# Altium PCB plaqueta.PcbDoc
Units mm, origin at the board's own origin, x right, y up, seen from the top; angles counter-clockwise.
Board outline 100 x 100.08 mm, 2 copper layers (Top Layer, Bottom Layer); 42 components, 19 nets, 121 pads, 0 vias.
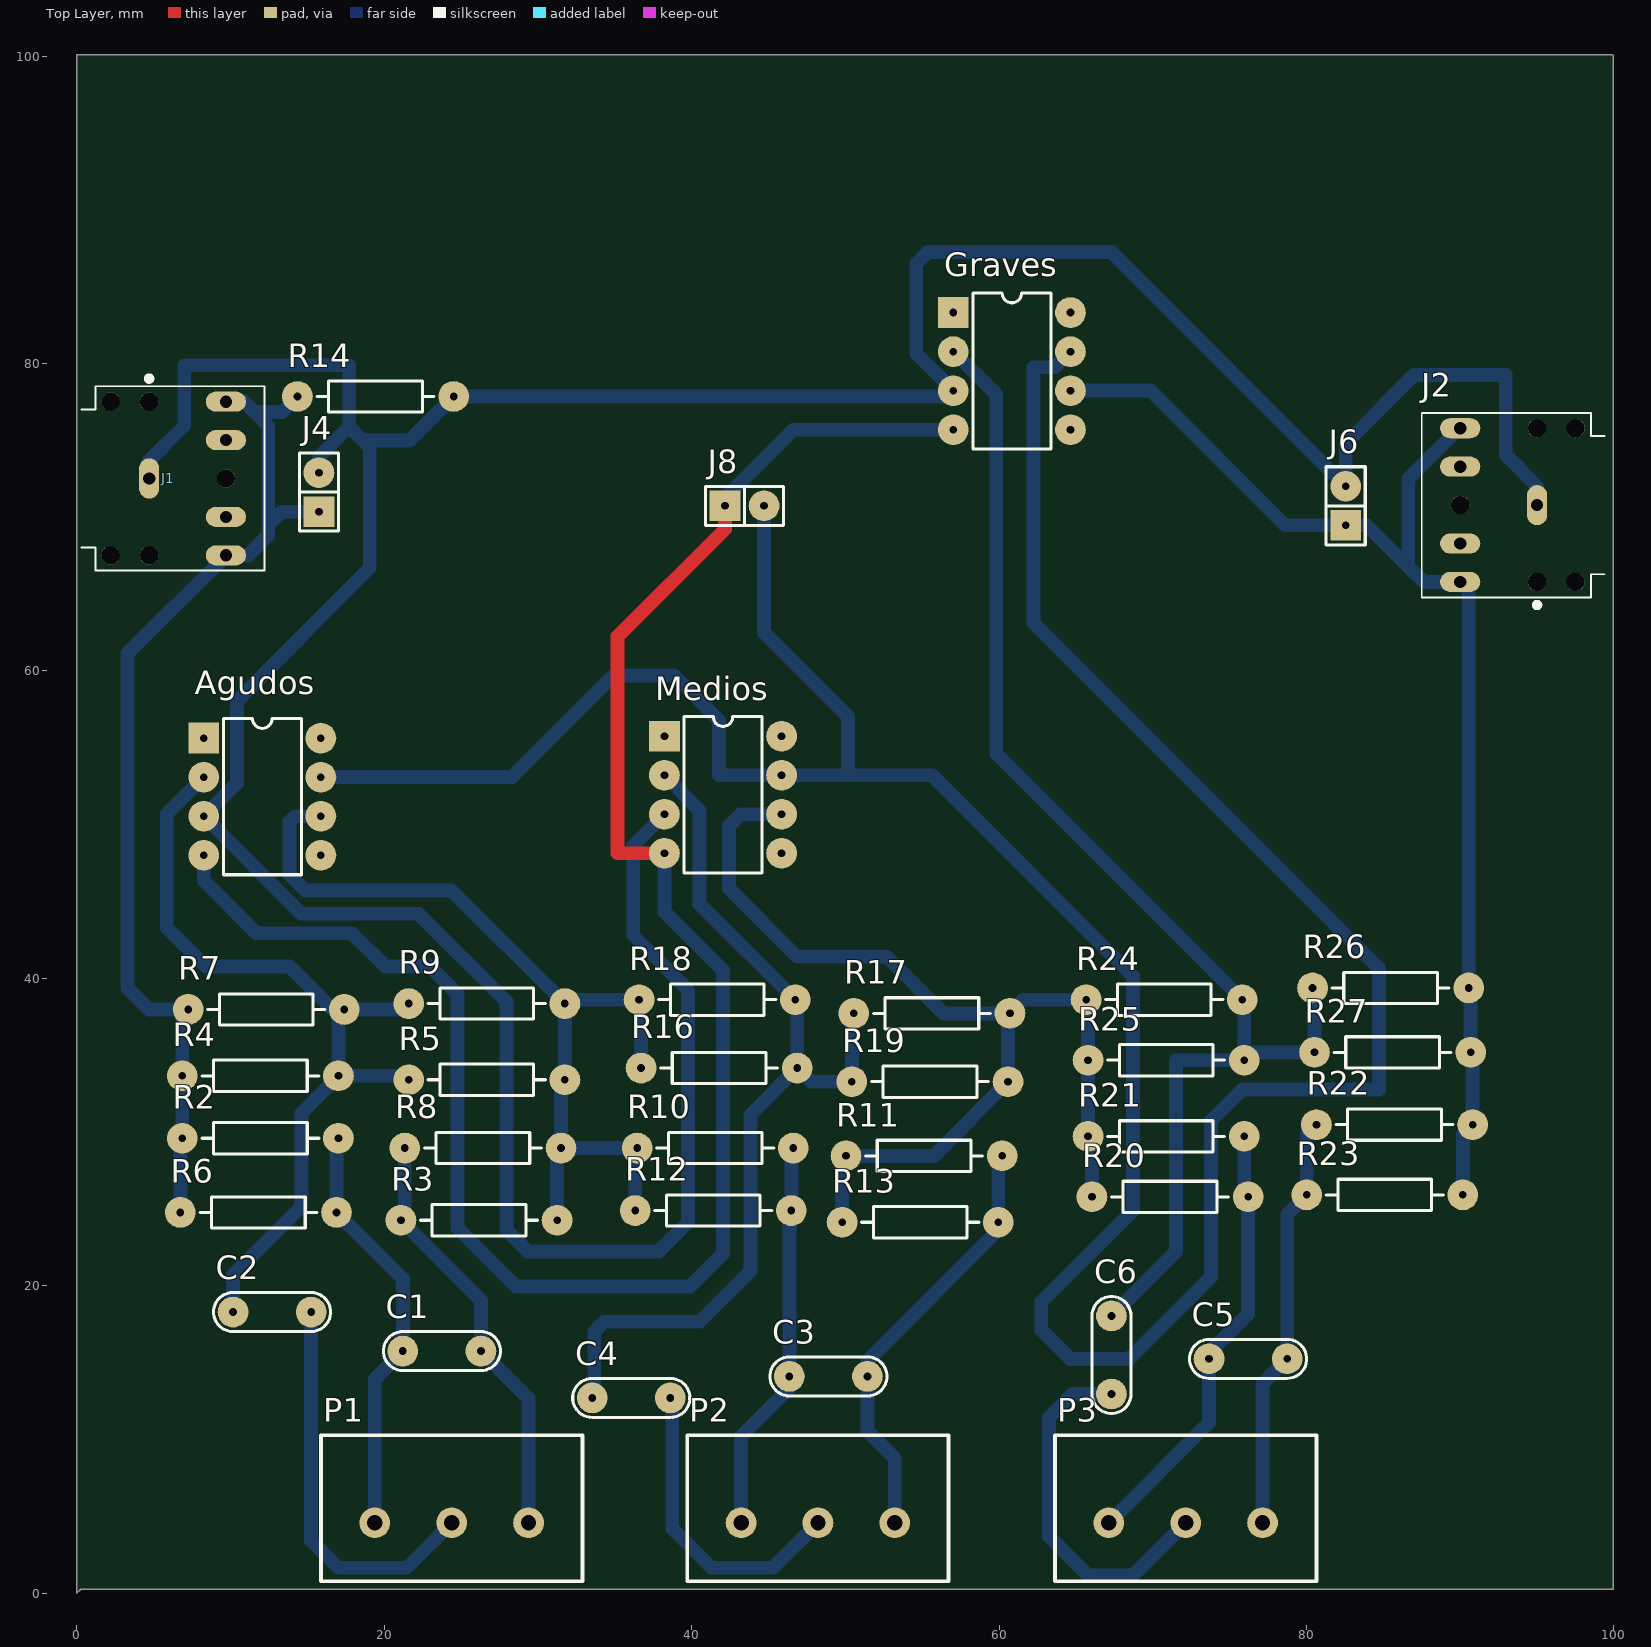
[diagram p0: Top Layer view]
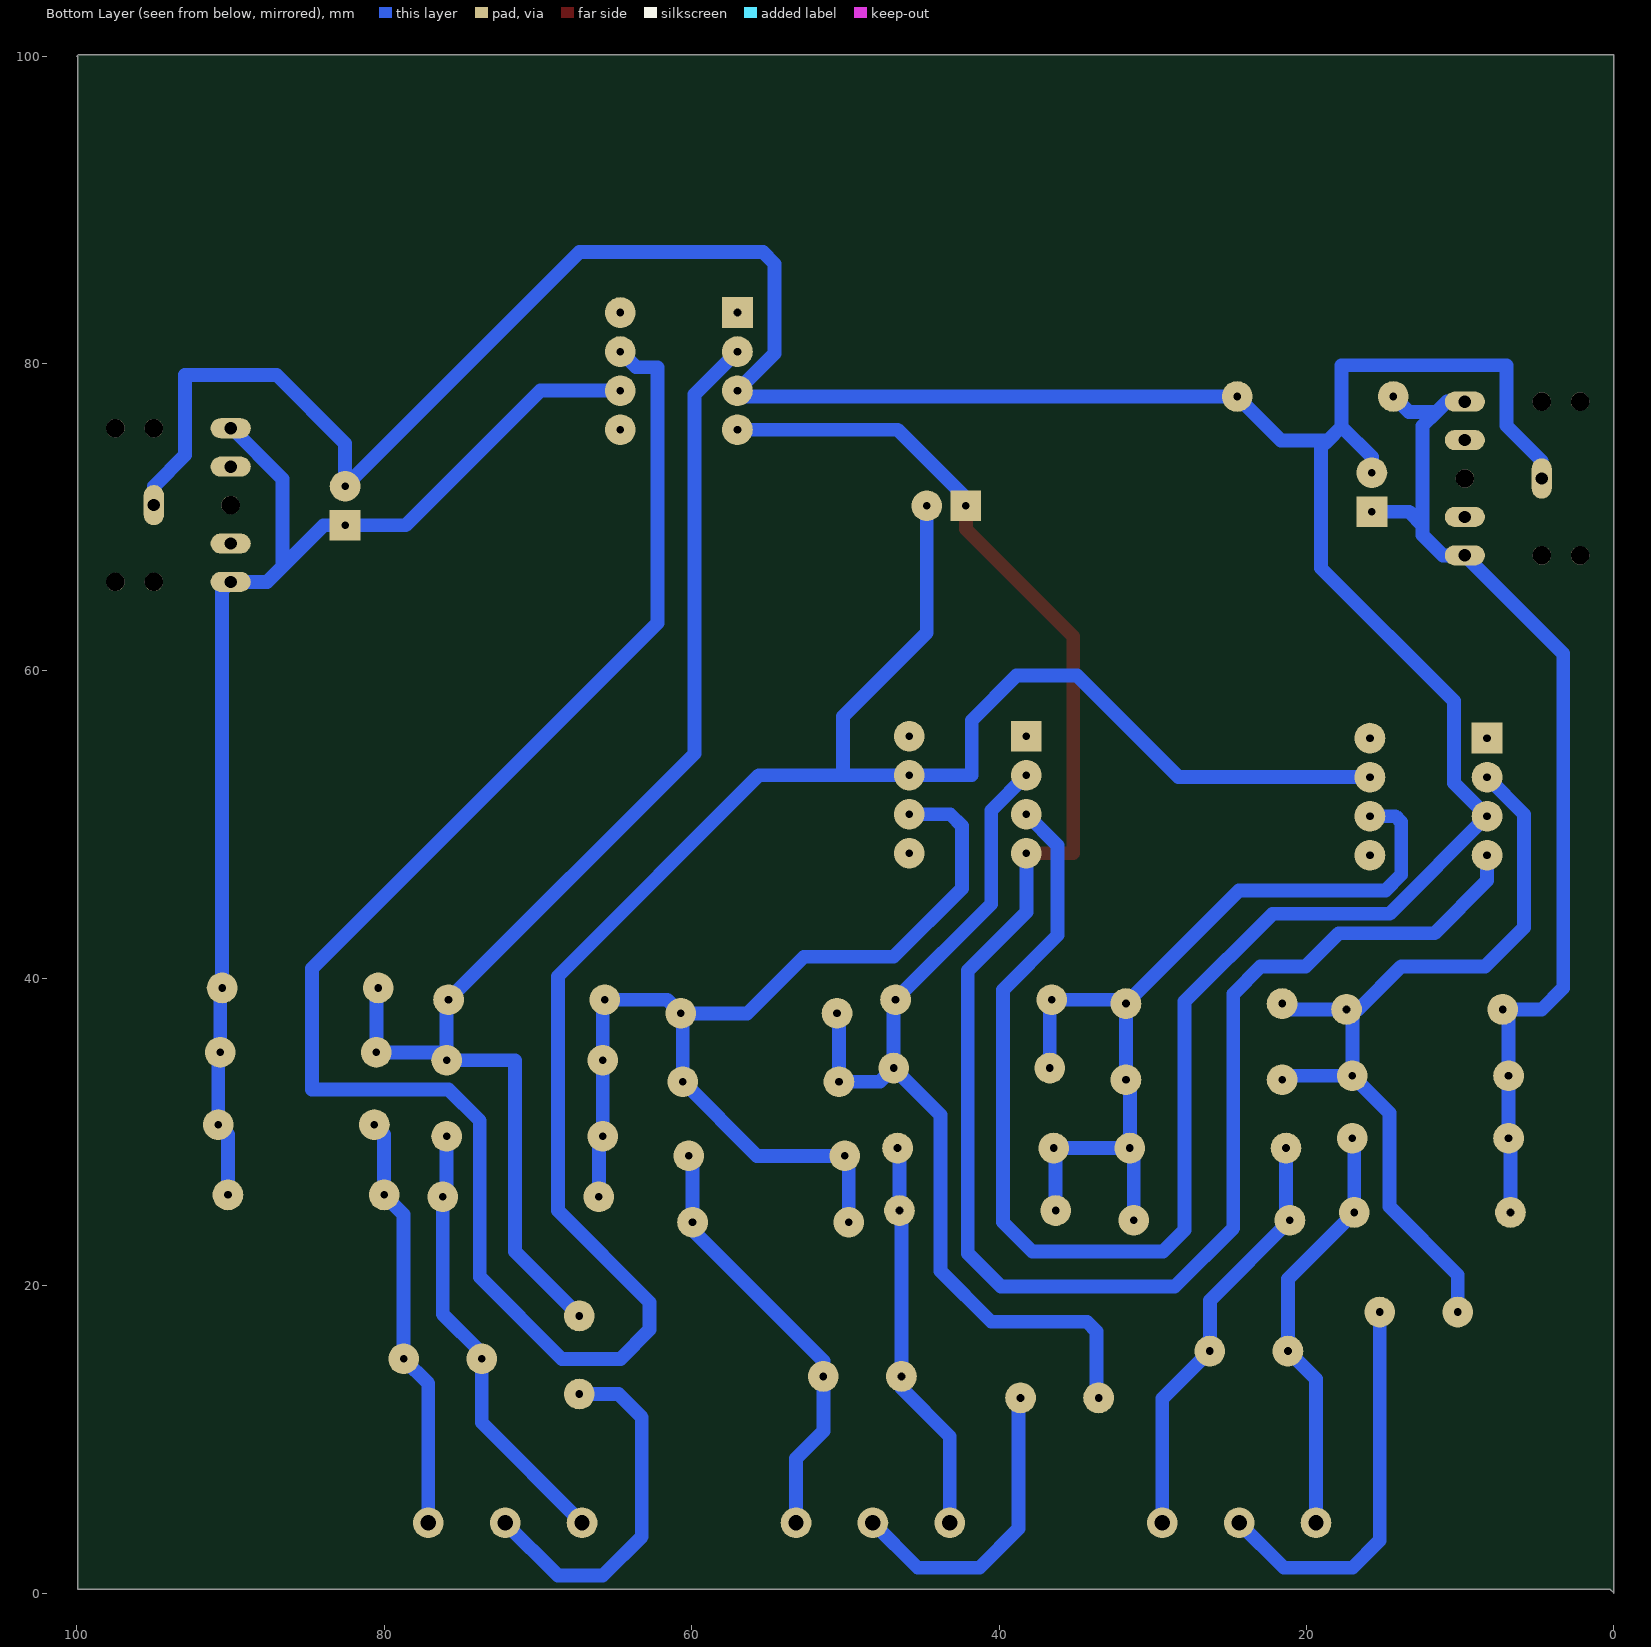
[diagram p1: Bottom Layer view, seen from below]
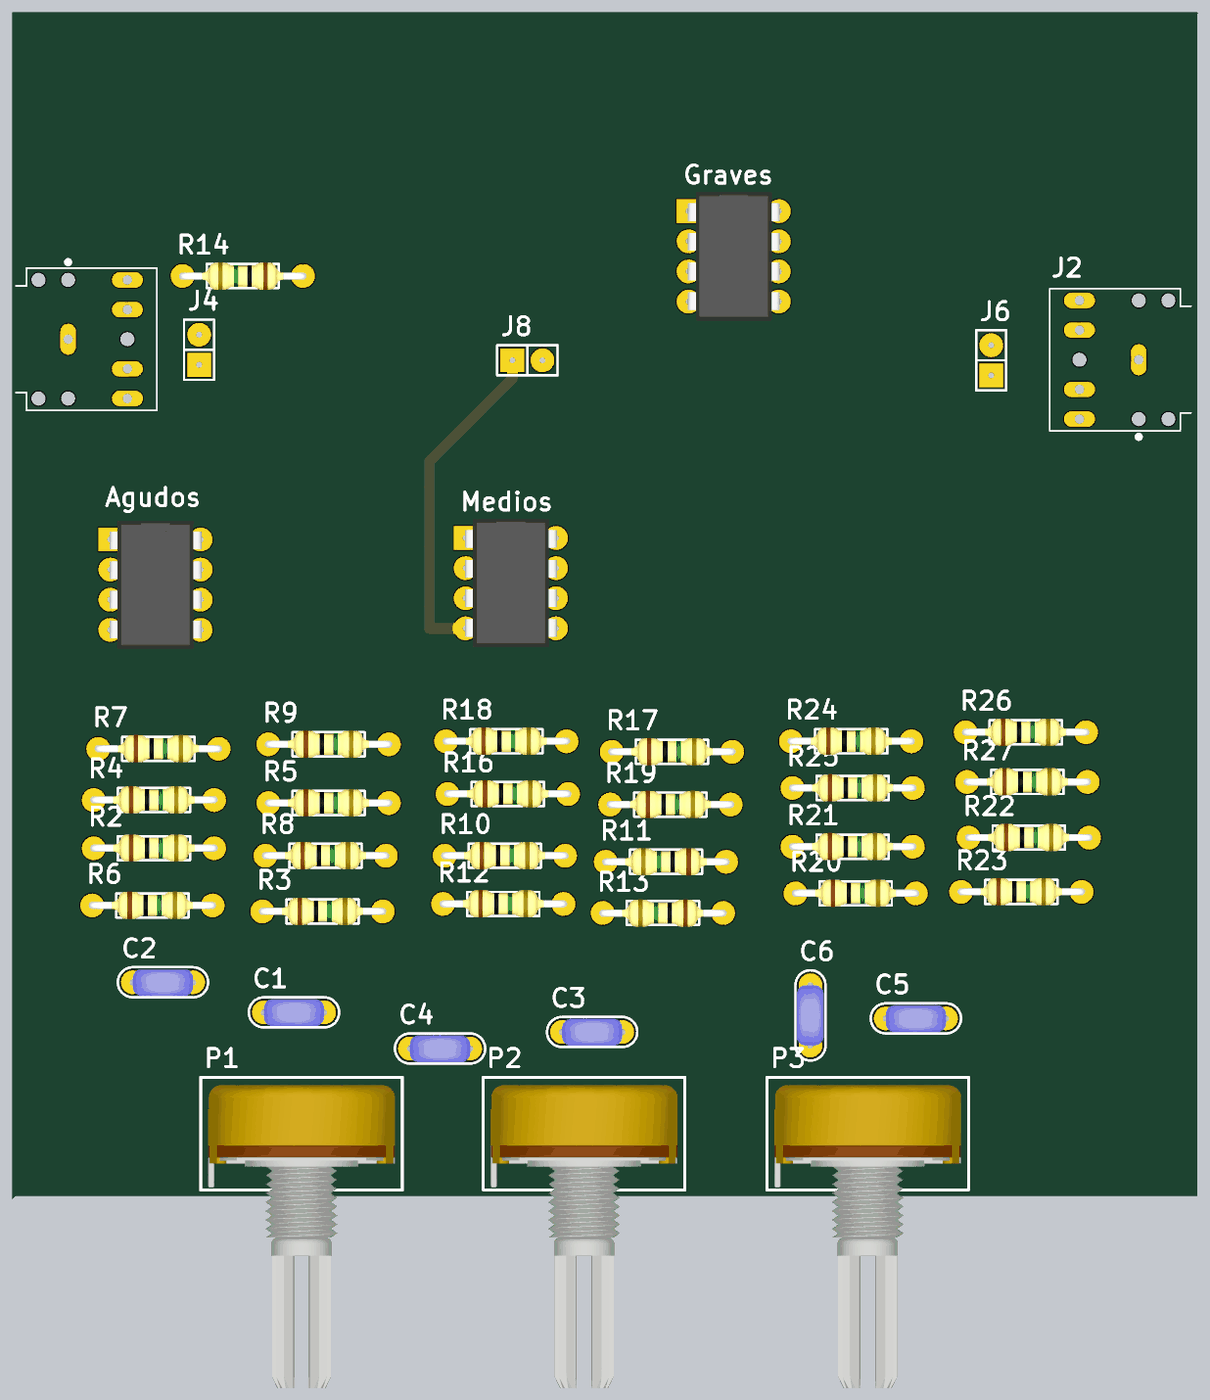
[diagram p2: 3D render of the assembled board from above, using the file's embedded part models]

## Layer stack, top to bottom
Top Solder: solder mask 0.0102, Solder Resist, Dk 3.5
Top Layer: signal copper 0.0356
Dielectric 1: dielectric 0.32, FR-4, Dk 4.8
Bottom Layer: signal copper 0.0356
Bottom Solder: solder mask 0.0102, Solder Resist, Dk 3.5

## Board outline
0,0 0.254,0.254 99.949,0.254 99.949,99.949 100,100 99.924,100.076 0,100.076

## Design rules (kind name [scope] priority, off if disabled: settings)
Clearance [All] p1: gap=0.254 ignorepadtopadclearanceinfootprint=FALSE except(0: Arc-Hole Track-Hole SMDPad-Hole THPad-Hole Via-Hole Fill-Hole Poly-Hole Region-Hole Text-Hole)
PolygonConnect [All] p1: connectstyle=Relief reliefconductorwidth=0.254 reliefentries=4 polygonreliefangle="90 Angle" airgapwidth=0.254
RoutingVias [All] p1: holewidth=0.711 width=1.27 viastyle="Through Hole" minholewidth=0.711 minwidth=1.27 maxholewidth=0.711 maxwidth=1.27
SolderMaskExpansion [All] p1: expansion=0.102
Width [All] p1: maxlimit=0.9 minlimit=0.9 preferedwidth=0.9
30 further rules are at their usual default settings.

## Components (designator, comment, footprint, x,y, rotation, side; value= is the part's Value field where it differs from the comment)
Agudos "IC_DIP8" DIP8 8.255,55.626 r0 top
C1 "CAP" CAP200 23.749,15.748 r0 top
C2 "CAP" CAP200 12.7,18.288 r0 top
C3 "CAP" CAP200 48.895,14.097 r0 top
C4 "CAP" CAP200 36.068,12.7 r0 top
C5 "CAP" CAP200 76.2,15.24 r0 top
C6 "CAP" CAP200 67.31,15.494 r270 top
Graves "IC_DIP8" DIP8 57.023,83.312 r0 top
J1 "SJ1-3525NG-GR" CUI_SJ1-3525NG-GR 4.699,72.517 r0 top
J2 "SJ1-3525NG-GR" CUI_SJ1-3525NG-GR 94.996,70.786 r180 top
J4 "CON2" SIP2 15.748,71.628 r90 top
J6 "CON2" SIP2 82.55,70.739 r90 top
J8 "CON2" SIP2 43.434,70.739 r0 top
Medios "IC_DIP8" DIP8 38.227,55.753 r0 top
P1 "POTENCIOMETRO" POTENCIOMETRO 24.384,4.572 r0 top
P2 "POTENCIOMETRO" POTENCIOMETRO 48.213,4.572 r0 top
P3 "POTENCIOMETRO" POTENCIOMETRO 72.136,4.572 r0 top
R2 "RES" RES400 6.858,29.591 r0 top
R3 "RES" RES400 21.082,24.257 r0 top
R4 "RES" RES400 6.858,33.655 r0 top
R5 "RES" RES400 21.59,33.401 r0 top
R6 "RES" RES400 6.731,24.765 r0 top
R7 "RES" RES400 7.239,37.973 r0 top
R8 "RES" RES400 21.336,28.956 r0 top
R9 "RES" RES400 21.59,38.354 r0 top
R10 "RES" RES400 36.449,28.956 r0 top
R11 "RES" RES400 60.198,28.448 r180 top
R12 "RES" RES400 36.322,24.892 r0 top
R13 "RES" RES400 59.944,24.13 r180 top
R14 "RES" RES400 24.511,77.851 r180 top
R16 "RES" RES400 36.703,34.163 r0 top
R17 "RES" RES400 50.546,37.719 r0 top
R18 "RES" RES400 36.576,38.608 r0 top
R19 "RES" RES400 50.419,33.274 r0 top
R20 "RES" RES400 66.04,25.781 r0 top
R21 "RES" RES400 65.786,29.718 r0 top
R22 "RES" RES400 80.645,30.48 r0 top
R23 "RES" RES400 80.01,25.908 r0 top
R24 "RES" RES400 65.659,38.608 r0 top
R25 "RES" RES400 65.786,34.671 r0 top
R26 "RES" RES400 80.391,39.37 r0 top
R27 "RES" RES400 80.518,35.179 r0 top

## Footprints (in the part's own frame and the unit in brackets; to place one, negate y for a bottom-side part, rotate by r counter-clockwise, add the part's x,y. Pads: shape width x height; smd on the part's side, far side on the other; paste and mask are expansions set on the pad)
CAP200 [mm]
  round 2 hole 0.5: 1(-2.54,0) 2(2.54,0)
  silkscreen extent -3.81,-1.27 3.81,1.27, body extent -2.79,-1.17 2.79,1.12, height 6.24
CUI_SJ1-3525NG-GR [mm]
  oval 1.308x2.616 hole 0.8: 1(0,0)
  oval 2.616x1.308 hole 0.8: 2(5,-5) 3(5,5) 4(5,-2.5) 5(5,2.5)
  round 1.2 hole 1.2 unplated: None(-2.5,-5) None(-2.5,5) None(0,-5) None(0,5) None(5,0)
  silkscreen extent -4.4,-6 7.5,6.67
DIP8 [mm]
  rect 2x2 hole 0.5: 1(0,0)
  round 2 hole 0.5: 2(0,-2.54) 3(0,-5.08) 4(0,-7.62) 5(7.62,-7.62) 6(7.62,-5.08) 7(7.62,-2.54) 8(7.62,0)
  silkscreen extent 1.27,-8.89 6.35,1.27, body extent -0.06,-9.21 7.7,1.59, height 4.5
POTENCIOMETRO [mm]
  round 2 hole 1: 1(-5,0) 2(0,0) 3(5,0)
  silkscreen extent -8.5,-3.8 8.5,5.7, body extent -7.87,-20.53 7.87,5.03, height 20.12
RES400 [mm]
  round 2 hole 0.5: 1(0,0) 2(10.16,0)
  silkscreen extent 1.27,-1.02 8.89,1.02, body extent -0.3,-1.14 10.46,1.17, height 2.43
SIP2 [mm]
  rect 2x2 hole 0.5: 1(-1.27,0)
  round 2 hole 0.5: 2(1.27,0)
  silkscreen extent -2.54,-1.27 2.54,1.27

## Nets (pads, with @x,y where several pads share a name; then routed paths per layer and width w, separated by ;. In a path a pad name is that pad's centre, name@x,y a point inside that pad or via, vN(x,y) a via of type N, cw(c..) or ccw(c..) an arc to the next point about the centre after c; other vN are vias at no path point)
-VCC: Agudos.4 Graves.4 J8.1 Medios.4 | length 129.6
  Top Layer w0.9: Medios.4 35.179,48.133 35.179,62.23 42.164,69.215 J8.1
  Bottom Layer w0.9: Agudos.4 8.255,46.355 11.684,42.926 17.907,42.926 20.066,40.767 22.987,40.767 24.765,38.989 24.765,23.749 28.575,19.939 39.878,19.939 42.037,22.098 42.037,40.513 38.227,44.323 Medios.4 ; J8.1 42.164,71.247 46.609,75.692 Graves.4
GND: Agudos.3 Graves.3 J1.1 J2.1 J4.2 J6.2 Medios.3 R14.1 | length 246.7
  Bottom Layer w0.9: J1.1 4.699,73.66 6.985,75.946 6.985,79.883 17.717,79.883 17.717,75.882 ; J4.2 15.748,73.914 17.717,75.882 ; Medios.3 36.195,48.641 36.195,42.799 39.751,39.243 39.751,24.13 37.846,22.225 29.337,22.225 27.94,23.622 27.94,38.481 22.225,44.196 14.605,44.196 Agudos.3 10.414,52.705 10.414,58.039 19.05,66.675 19.05,74.549 18.605,74.993 ; J2.1 94.996,72.009 92.964,74.041 92.964,79.248 86.995,79.248 82.55,74.803 J6.2 67.31,87.249 55.372,87.249 54.61,86.487 54.61,80.645 Graves.3 56.642,77.851 R14.1 21.653,74.993 18.605,74.993 ; 17.717,75.882 18.605,74.993
NetAgudos_2: Agudos.2 C2.1 R4.2 R5.1 R7.2 R9.1 | length 56.3
  Bottom Layer w0.9: Agudos.2 5.842,50.673 5.842,43.307 8.382,40.767 13.843,40.767 16.637,37.973 R7.2 ; C2.1 10.16,20.701 14.605,25.146 14.605,31.242 R4.2 ; R5.1 21.336,33.655 R4.2 ; R9.1 21.209,37.973 R7.2 ; R4.2 17.018,37.592 R7.2
NetAgudos_6: Agudos.6 R3.2 R5.2 R8.2 R9.2 R10.1 R12.1 R16.1 R18.1 | length 59.8
  Bottom Layer w0.9: Agudos.6 14.224,50.546 13.843,50.165 13.843,46.736 14.859,45.72 24.384,45.72 R9.2 ; R3.2 31.242,28.702 R8.2 ; R12.1 36.322,28.829 R10.1 R8.2 ; R16.1 36.703,38.481 R18.1 32.004,38.608 R9.2 ; R8.2 31.496,33.147 R5.2 R9.2
NetC1_1: C1.1 P1.1 R2.2 R6.2 | length 27.6
  Bottom Layer w0.9: R2.2 16.891,29.464 R6.2 21.209,20.447 C1.1 19.384,13.923 P1.1
NetC1_2: C1.2 P1.3 R3.1 R8.1 | length 27.9
  Bottom Layer w0.9: R8.1 21.336,24.511 R3.1 26.289,19.05 C1.2 29.384,12.653 P1.3
NetC2_2: C2.2 P1.2 | length 25.9
  Bottom Layer w0.9: C2.2 15.24,3.429 17.018,1.651 21.463,1.651 P1.2
NetC3_1: C3.1 P2.1 R10.2 R12.2 | length 25.9
  Bottom Layer w0.9: P2.1 43.213,10.193 46.355,13.335 C3.1 46.355,24.765 R12.2 46.482,28.829 R10.2 R10.2@46.609,29.083
NetC3_2: C3.2 P2.3 R11.1 R13.1 | length 28.2
  Bottom Layer w0.9: P2.3 53.213,8.763 51.435,10.541 C3.2 51.435,15.113 59.944,23.622 R13.1 59.944,28.194 R11.1
NetC4_1: C4.1 Medios.2 R16.2 R17.1 R18.2 R19.1 | length 61.7
  Bottom Layer w0.9: C4.1 33.655,12.827 33.655,17.018 34.29,17.653 40.513,17.653 43.815,20.955 43.815,31.115 R16.2 ; Medios.2 40.513,50.927 40.513,44.831 R18.2 46.863,38.481 R16.2 ; R17.1 50.419,37.592 R19.1 47.752,33.274 R16.2
NetC4_2: C4.2 P2.2 | length 20.3
  Bottom Layer w0.9: C4.2 38.735,12.573 38.735,4.191 41.275,1.651 45.292,1.651 P2.2
NetC5_1: C5.1 P3.1 R20.2 R21.2 | length 29
  Bottom Layer w0.9: P3.1 73.66,11.096 C5.1 73.66,15.621 76.2,18.161 R20.2 75.946,26.035 R21.2
NetC5_2: C5.2 P3.3 R22.1 R23.1 | length 27.4
  Bottom Layer w0.9: P3.3 77.136,13.636 C5.2 78.74,24.638 R23.1 80.01,29.845 R22.1
NetC6_1: C6.1 Graves.2 R24.2 R25.2 R26.1 R27.1 | length 85.8
  Bottom Layer w0.9: Graves.2 59.817,77.978 59.817,54.61 R24.2 75.946,38.481 R25.2 ; C6.1 71.501,22.225 71.501,34.671 R25.2 ; R26.1 80.518,39.243 R27.1 76.454,35.179 R25.2
NetC6_2: C6.2 P3.2 | length 23.8
  Bottom Layer w0.9: C6.2 64.77,12.954 63.246,11.43 63.246,3.683 65.786,1.143 68.707,1.143 P3.2
NetGraves_6: Graves.6 J2.2 J2.3 J6.1 R22.2 R23.2 R26.2 R27.2 | length 81.4
  Bottom Layer w0.9: Graves.6 69.85,78.232 78.613,69.469 J6.1 83.947,69.469 86.614,66.802 ; J2.2 89.921,75.786 86.614,72.479 86.614,66.802 ; R23.2 90.17,29.845 R22.2 90.805,35.052 R27.2 90.678,39.243 R26.2 90.551,65.231 J2.3 87.63,65.786 86.614,66.802
NetJ1_2: J1.2 J1.3 J4.1 R2.1 R4.1 R6.1 R7.1 R14.2 | length 69.4
  Bottom Layer w0.9: R6.1 6.731,29.464 R2.1 R4.1 6.858,37.592 R7.1 4.699,37.973 3.302,39.37 3.302,61.12 J1.2 11.129,67.517 12.446,68.834 12.446,69.469 ; J1.3 10.875,77.517 11.557,76.835 ; R14.2 13.335,76.835 11.557,76.835 ; J4.1 13.335,70.358 12.446,69.469 ; 11.557,76.835 12.446,75.946 12.446,69.469
NetMedios_6: Medios.6 R11.2 R13.2 R17.2 R19.2 R20.1 R21.1 R24.1 R25.1 | length 69.2
  Bottom Layer w0.9: Medios.6 43.18,50.673 42.418,49.911 42.418,45.847 46.863,41.402 52.705,41.402 56.388,37.719 R17.2 ; R13.2 49.784,28.194 R11.2 55.753,28.448 R19.2 60.579,37.592 R17.2 ; R20.1 66.04,29.464 R21.1 R25.1 65.786,38.481 R24.1 61.595,38.608 R17.2
VCC: Agudos.7 Graves.7 J8.2 Medios.7 | length 206.1
  Bottom Layer w0.9: Agudos.7 28.321,53.086 34.925,59.69 38.862,59.69 41.783,56.769 41.783,53.213 Medios.7 50.165,53.213 ; J8.2 44.704,62.484 50.165,57.023 50.165,53.213 ; Graves.7 63.627,79.756 62.23,79.756 62.23,63.119 84.709,40.64 84.709,32.766 75.819,32.766 73.787,30.734 73.787,20.574 68.453,15.24 64.643,15.24 62.738,17.145 62.738,18.923 68.707,24.892 68.707,40.132 55.626,53.213 50.165,53.213
pads on no net: Agudos.1 Agudos.5 Agudos.8 Graves.1 Graves.5 Graves.8 J1.4 J1.5 J1.None J2.4 J2.5 J2.None Medios.1 Medios.5 Medios.8

## Text inside footprints (layer, text, board x,y; h text height)
J1: Mechanical 1 "PCB edge" at -7.848,78.289 h1.88
J2: Mechanical 1 "PCB edge" at 107.543,65.014 h1.88 r180